# EAGLE board CANBUS_USB_Updated v3 (EAGLE 9.7.0)
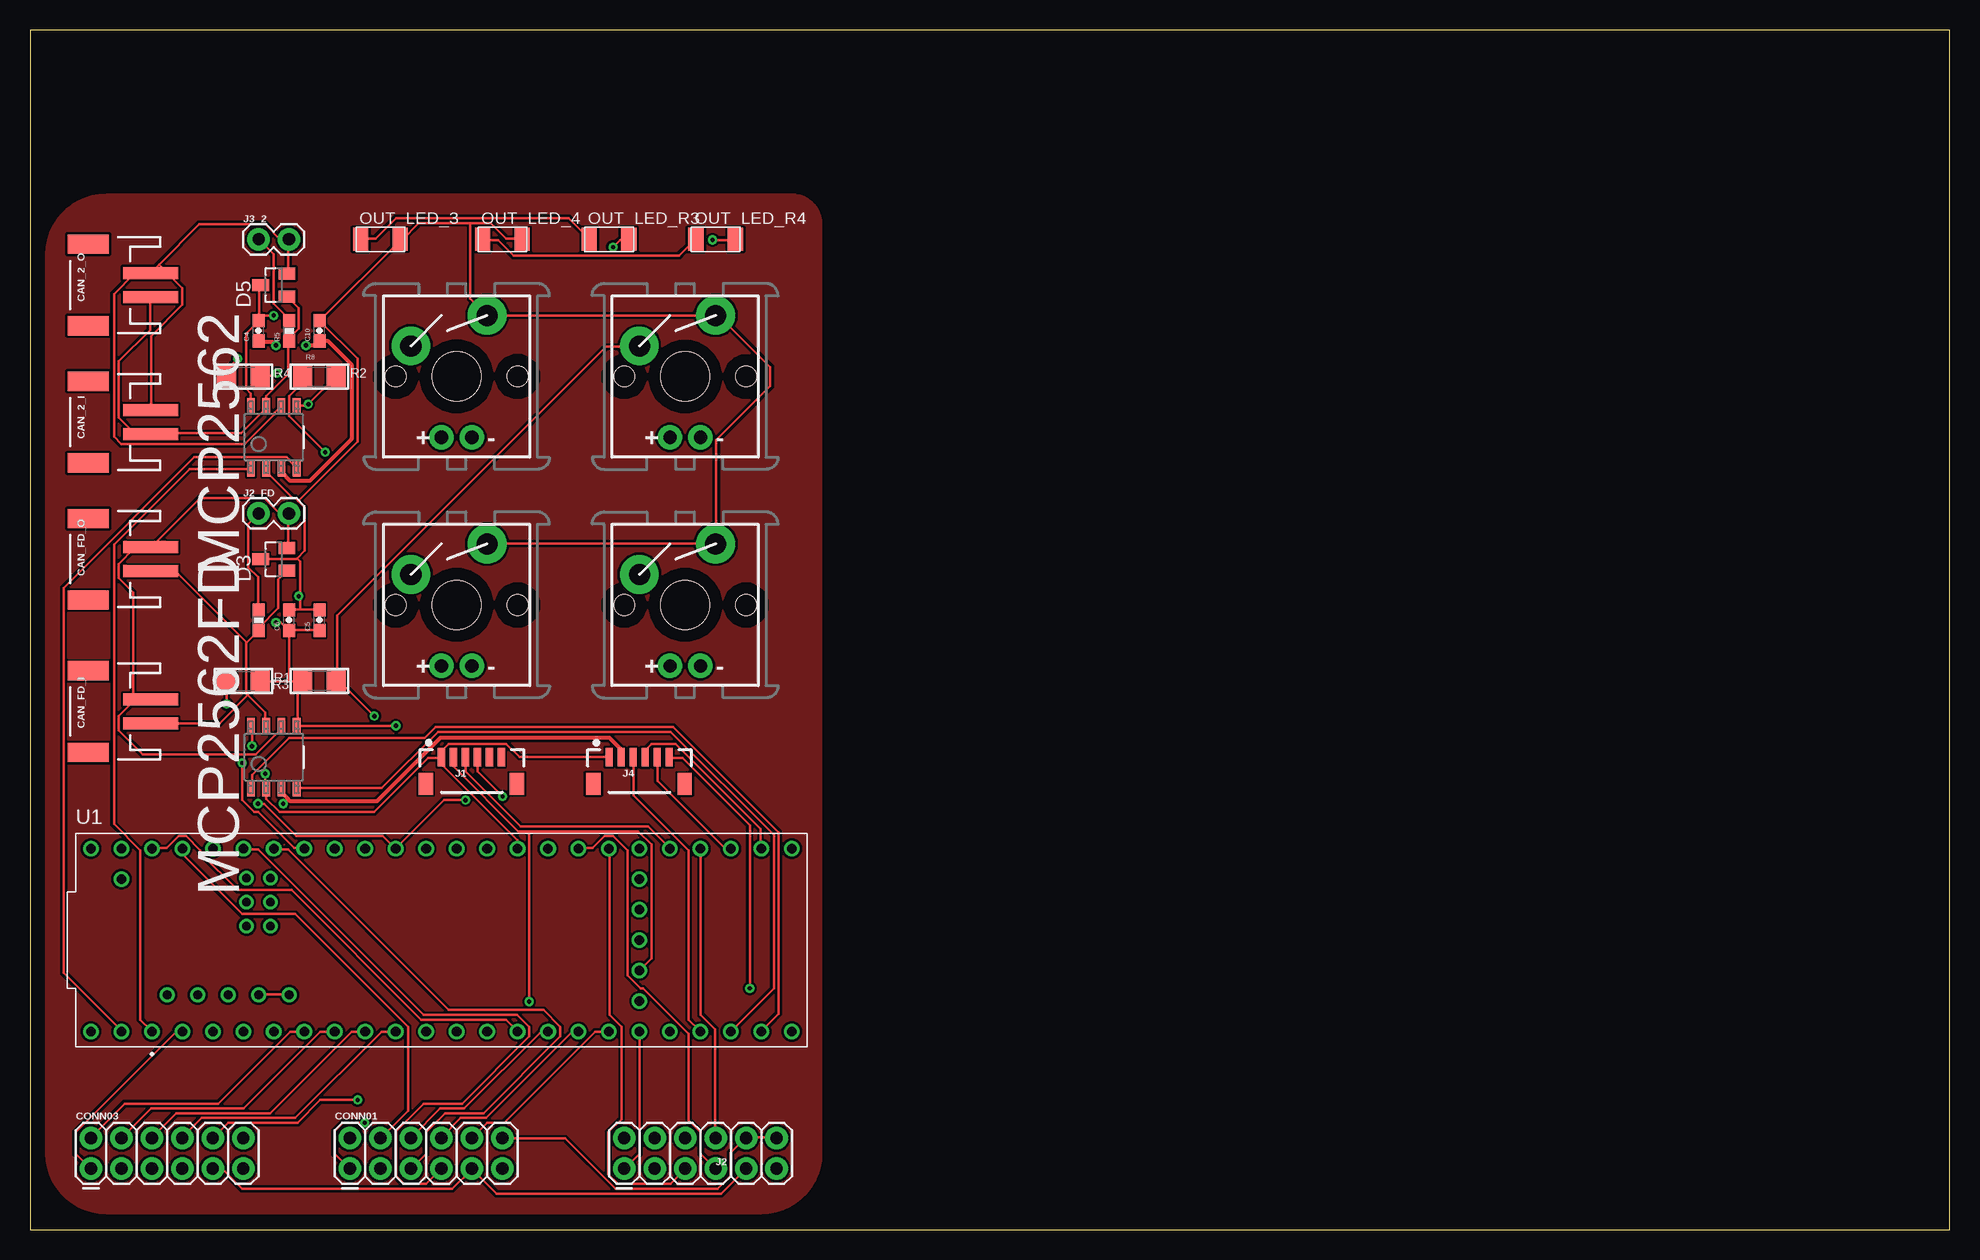
[diagram p0: board, top side]
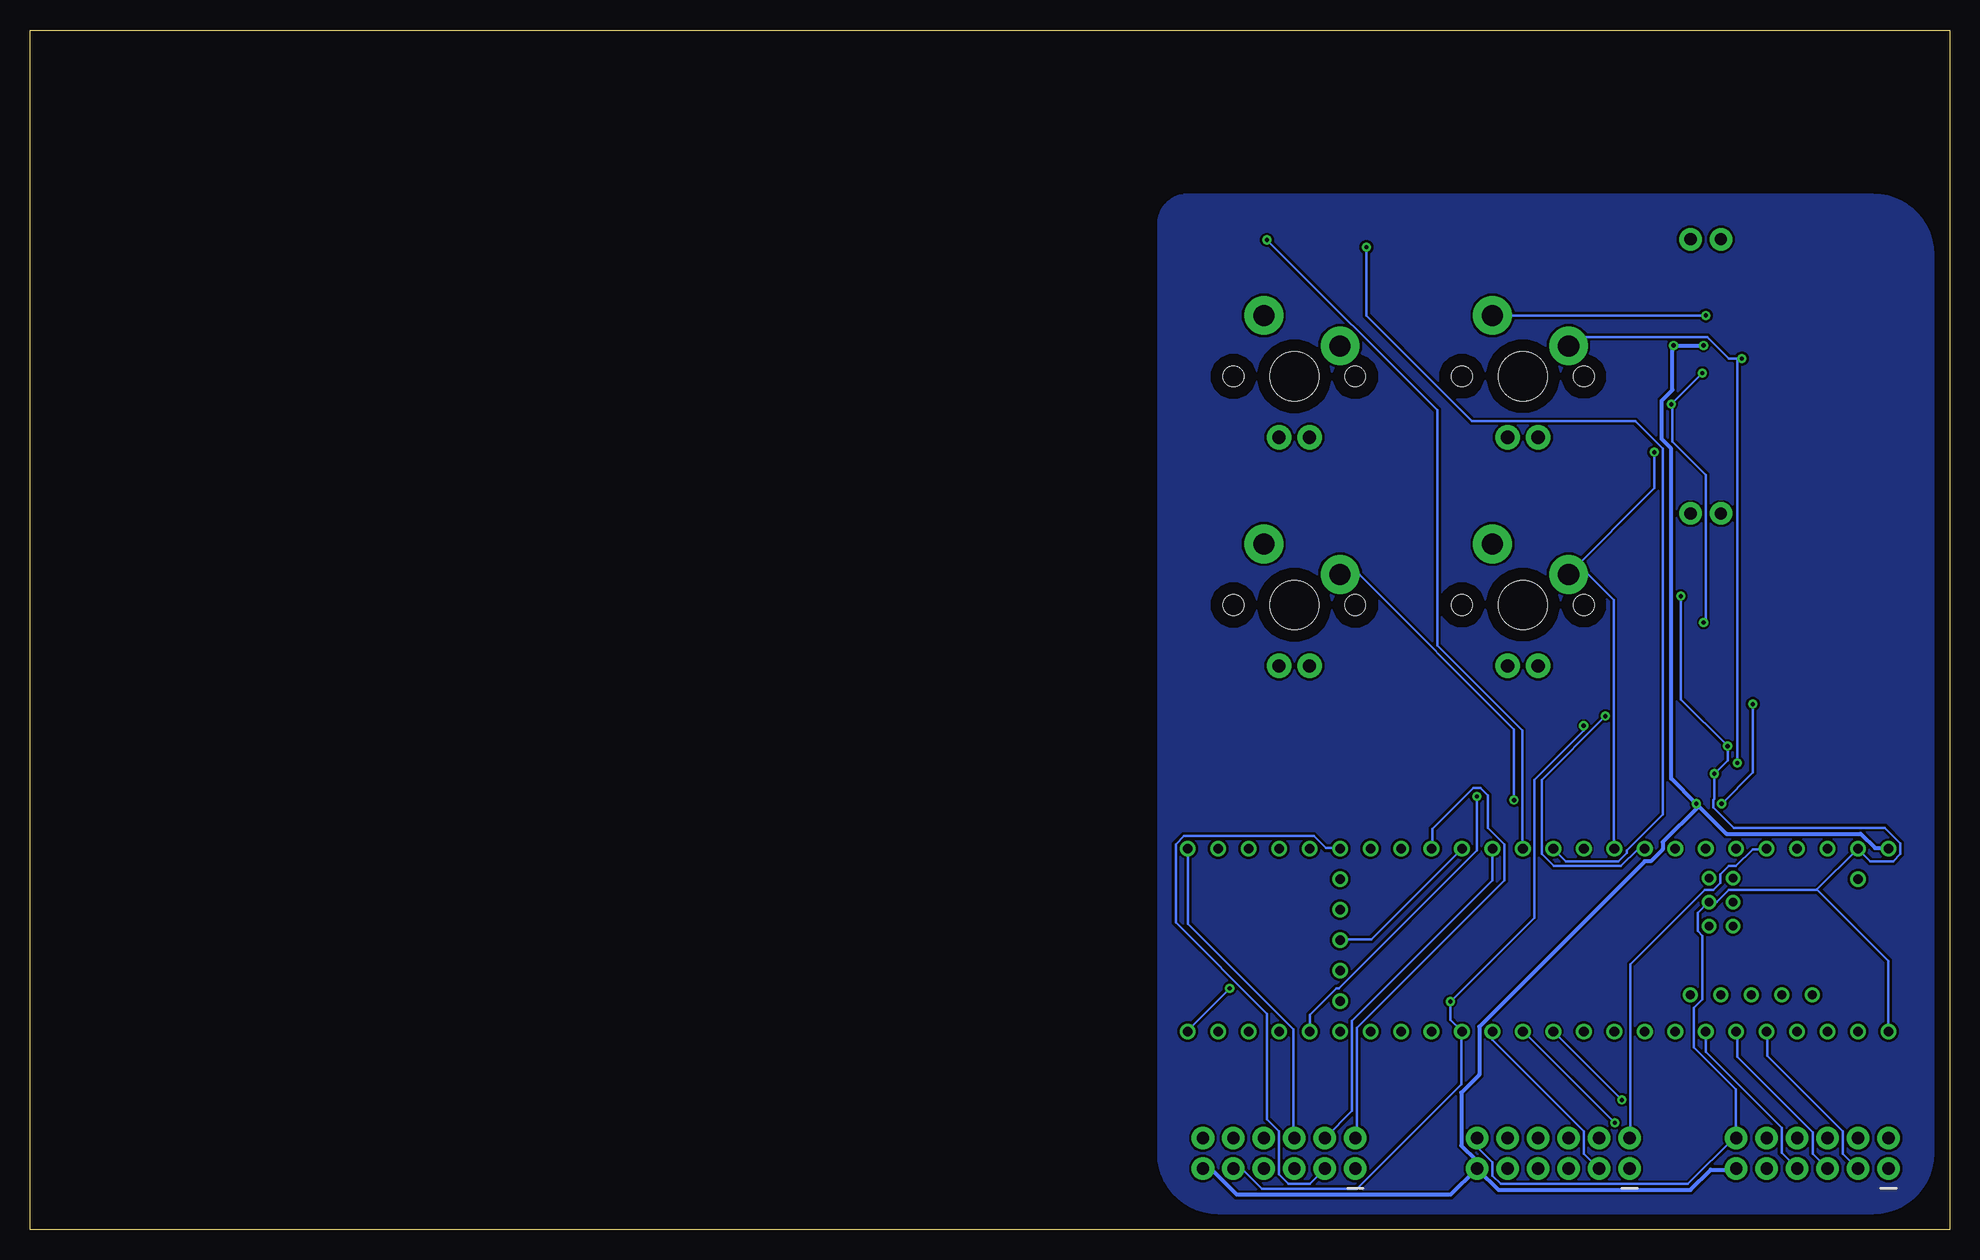
[diagram p1: board, bottom side, seen from below]

Size 160 x 100 mm. Coordinates in mm from the lower left corner, seen from the top.
Outline: 0,0 160,0 160,100 0,100 0,0
Copper layers (1*16): Top / Bottom
Stack-up Default Layer Stack: Top User Defined 0.035mm / Dielectric-1 User Defined 1.5mm / Bottom User Defined 0.035mm
Design rules "default *": minimum track width 6mil, minimum drill 0.35mm, track to track 6mil, track to pad 6mil, pad to pad 6mil, via to via 6mil, smd to smd 6mil, copper to edge 40mil, drill to drill 6mil, minimum pad ring 10mil, minimum via ring 8mil, stop-mask expansion 4mil, vias tented up to drill 0mil, thermal gap 10mil
Net classes: 0 default: width 0.2 mm, clearance 0.2 mm; 1 gnd: width 0.2 mm, clearance 0.2 mm; 3 vcc: width 0.35 mm, clearance 0.2 mm; 4 vcc5: width 0.35 mm, clearance 0.2 mm

## Footprints (pad centres in the part's own frame; a part is rotated, then mirrored left to right if it is on the bottom)
0603-CAP = smd 1.1 x 1: 1 -0.85,0; 2 0.85,0
JST-2-SMD = smd 1 x 4.6: 1 -1,-3.7; 2 1,-3.7 | smd 1.6 x 3.4: NC1 -3.4,1.5; NC2 3.4,1.5
2X6 = drill 1.016 pad 1.88: 1 0,0; 2 0,2.54; 3 2.54,0; 4 2.54,2.54; 5 5.08,0; 6 5.08,2.54; 7 7.62,0; 8 7.62,2.54; 9 10.16,0; 10 10.16,2.54; 11 12.7,0; 12 12.7,2.54
SOT23 = smd 1 x 1.4: 1 -0.95,-1.1; 2 0.95,-1.1; 3 0,1.1
1X06-1MM = smd 0.6 x 1.55: 1 -2.54,1.27; 2 -1.54,1.27; 3 -0.54,1.27; 4 0.46,1.27; 5 1.46,1.27; 6 2.46,1.27 | smd 1.2 x 1.8: P$1 -3.84,-0.955; P$2 3.76,-0.955
1X02 = drill 1.016 pad 1.88: 1 0,0; 2 2.54,0
MCP2562 = smd 1.27 x 0.635: CANH 2.625,0.635; CANL 2.625,-0.635; RXD -2.625,-1.905; STBY 2.625,1.905; TXD -2.625,1.905; VDD -2.625,-0.635; VIO 2.625,-1.905; VSS -2.625,0.635
LED1206FAB = smd 1.27 x 1.905: 1 -1.651,0; 2 1.651,0
R1206FAB = smd 1.27 x 1.905: 1 -1.651,0; 2 1.651,0
1206 = smd 1.6 x 1.8: 1 -1.4,0; 2 1.4,0
0603-RES = smd 1.1 x 1: 1 -0.85,0; 2 0.85,0
CHERRY-MX-LED = drill 1.092 pad 2.032: A -1.27,-5.08; K 1.27,-5.08 | drill 1.753 pad 3.226: S1 -3.81,2.54; S2 2.54,5.08 | hole 4.089: 0,0 | hole 1.707: -5.08,0; 5.08,0
MODULE_DEV-16771 = drill 0.8: 0 -26.67,-7.62; 1 -24.13,-7.62; 2 -21.59,-7.62; 3 -19.05,-7.62; 3.3V_1 6.35,-7.62; 3.3V_2 -24.13,7.62; 3.3V_3 16.51,-2.54; 4 -16.51,-7.62; 5 -13.97,-7.62; 6 -11.43,-7.62; 7 -8.89,-7.62; 8 -6.35,-7.62; 9 -3.81,-7.62; 10 -1.27,-7.62; 11 1.27,-7.62; 12 3.81,-7.62; 13 3.81,7.62; 14 1.27,7.62; 15 -1.27,7.62; 16 -3.81,7.62; 17 -6.35,7.62; 18 -8.89,7.62; 19 -11.43,7.62; 20 -13.97,7.62; 21 -16.51,7.62; 22 -19.05,7.62; 23 -21.59,7.62; 24 8.89,-7.62; 25 11.43,-7.62; 26 13.97,-7.62; 27 16.51,-7.62; 28 19.05,-7.62; 29 21.59,-7.62; 30 24.13,-7.62; 31 26.67,-7.62; 32 29.21,-7.62; 33 29.21,7.62; 34 26.67,7.62; 35 24.13,7.62; 36 21.59,7.62; 37 19.05,7.62; 38 16.51,7.62; 39 13.97,7.62; 40 11.43,7.62; 41 8.89,7.62; GND1 -29.21,-7.62; GND2 6.35,7.62; GND3 -26.67,7.62; GND4 16.51,0; ON/OFF 16.51,5.08; PROGRAM 16.51,2.54; VBAT 16.51,-5.08; VIN -29.21,7.62; VUSB -26.67,5.08 | drill 0.75: 5V -22.86,-4.57; D+ -17.78,-4.57; D- -20.32,-4.57; USB_GND1 -15.24,-4.57; USB_GND2 -12.7,-4.57 | drill 0.7: GND5 -14.24,3.17; LED -16.24,3.17; R+ -16.24,5.17; R- -14.24,5.17; T+ -14.24,1.17; T- -16.24,1.17

## Placement (x,y rotation side)
C4  0.1uf  [0603-CAP]  19.05,74.93 90 top
C5  0.1uf  [0603-CAP]  24.13,50.8 90 top
C6  0.1uf  [0603-CAP]  21.59,50.8 90 top
C10  0.1uf  [0603-CAP]  24.13,74.93 90 top
CAN_2_I  [JST-2-SMD]  6.35,67.31 90 top
CAN_2_O  [JST-2-SMD]  6.35,78.74 90 top
CAN_FD_I  [JST-2-SMD]  6.35,43.18 90 top
CAN_FD_O  [JST-2-SMD]  6.35,55.88 90 top
CONN01  2X6 FEMALE  [2X6]  26.67,5.08 0 top
CONN03  2X6 FEMALE  [2X6]  5.08,5.08 0 top
D3  PESD1CAN  [SOT23]  20.32,55.88 90 top
D5  PESD1CAN  [SOT23]  20.32,78.74 90 top
J1  [1X06-1MM]  36.83,38.1 0 top
J2  2X6 FEMALE  [2X6]  49.53,5.08 0 top
J2_FD  [1X02]  19.05,59.69 0 top
J3_2  [1X02]  19.05,82.55 0 top
J4  [1X06-1MM]  50.8,38.1 0 top
MCP2562  MCP2562  [MCP2562]  20.32,66.04 90 top
MCP2562FD  MCP2562  [MCP2562]  20.32,39.37 90 top
OUT_LED_3  LEDFAB1206  [LED1206FAB]  29.21,82.55 0 top
OUT_LED_4  LEDFAB1206  [LED1206FAB]  39.37,82.55 0 top
OUT_LED_R3  500  [R1206FAB]  48.26,82.55 0 top
OUT_LED_R4  500  [R1206FAB]  57.15,82.55 0 top
R1  [1206]  17.78,45.72 0 top
R2  [1206]  24.13,71.12 0 top
R3  [1206]  24.13,45.72 180 top
R4  [1206]  17.78,71.12 0 top
R5  120Ohms  [0603-RES]  21.59,74.93 90 top
R8  120Ohms FD  [0603-RES]  19.05,50.8 90 top
S1  CHERRY-MX-LED  [CHERRY-MX-LED]  54.61,52.07 0 top
S2  CHERRY-MX-LED  [CHERRY-MX-LED]  35.56,52.07 0 top
S3  CHERRY-MX-LED  [CHERRY-MX-LED]  54.61,71.12 0 top
S4  CHERRY-MX-LED  [CHERRY-MX-LED]  35.56,71.12 0 top
U1  DEV-16771  [MODULE_DEV-16771]  34.29,24.13 0 top

## Library data of the parts
C4-C6 C10 = SparkFun-Capacitors; PROD_ID: CAP-00810
CAN_2_I CAN_2_O CAN_FD_I CAN_FD_O = SparkFun-Connectors; PROD_ID: CONN-11443
CONN01 CONN03 J2 = SparkFun-Connectors; PROD_ID: CONN-12423
D3 D5 = diode
J1 J4 = SparkFun-Connectors; PROD_ID: CONN-08249; SF_ID: GPS-00579
J2_FD J3_2 = SparkFun-Connectors
MCP2562 MCP2562FD = MCP2562
OUT_LED_3 OUT_LED_4 OUT_LED_R3 OUT_LED_R4 = fab
R1-R4 = microbuilder
R5 R8 = SparkFun-Resistors; PROD_ID: RES-00824
S1-S4 = cherry-temp
U1 = DEV-16771; AVAILABILITY: In Stock; DESCRIPTION: RT1062 Teensy 4.1 series ARM® Cortex®-M7 MPU Embedded Evaluation Board; MF: SparkFun Electronics; MP: DEV-16771; PACKAGE: None; PRICE: None; PURCHASE-URL: https://pricing.snapeda.com/search?q=DEV-16771&ref=eda

## Nets
3.3V: C5.1 C6.1 CONN01.9 CONN03.9 J1.2 J2.9 MCP2562.VIO MCP2562FD.VIO R1.2 R2.2 R3.2 R4.2 U1.3.3V_1 U1.3.3V_2 U1.3.3V_3
5V: U1.5V
CAN_H: CAN_FD_I.1 CAN_FD_O.1 D3.1 MCP2562FD.CANH R8.1
CAN_H1: CAN_2_I.1 CAN_2_O.1 D5.1 MCP2562.CANH R5.1
CAN_L: CAN_FD_I.2 CAN_FD_O.2 D3.2 J2_FD.2 MCP2562FD.CANL
CAN_L1: CAN_2_I.2 CAN_2_O.2 D5.2 J3_2.2 MCP2562.CANL
CAN_RX2: MCP2562.RXD U1.0
CAN_RX3: MCP2562FD.RXD U1.30
CAN_TX2: MCP2562.TXD U1.1
CAN_TX3: MCP2562FD.TXD U1.31
GND_MCU: C4.2 C5.2 C6.2 C10.2 CONN01.12 CONN03.12 D3.3 D5.3 J1.1 J2.10 J2.12 J4.1 MCP2562.STBY MCP2562.VSS MCP2562FD.STBY MCP2562FD.VSS OUT_LED_3.2 OUT_LED_4.2 S1.S2 S2.S2 S3.S2 S4.S2 U1.GND1 U1.GND2 U1.GND3 U1.GND4 U1.GND5
GPIO_01: CONN03.1 U1.2
GPIO_02: CONN03.3 U1.3
GPIO_03: CONN03.5 U1.4
GPIO_04: CONN03.7 U1.5
GPIO_05: CONN03.2 U1.6
GPIO_06: CONN03.4 U1.7
GPIO_07: CONN03.6 U1.8
GPIO_08: CONN03.8 U1.9
GPIO_09: CONN03.10 U1.10
GPIO_10: CONN01.1 U1.11
GPIO_11: CONN01.3 U1.12
GPIO_12: CONN01.5 U1.20
GPIO_13: CONN01.7 U1.21
GPIO_14: CONN01.2 U1.22
GPIO_15: CONN01.4 U1.23
GPIO_16: CONN01.6 U1.24
GPIO_17: CONN01.8 U1.25
GPIO_18: CONN01.10 U1.26
GPIO_19: J2.1 U1.27
GPIO_20: J2.3 U1.38
GPIO_21: J2.5 U1.39
GPIO_22: J2.7 U1.40
GPIO_23: J2.2 U1.41
GPIO_24: J2.4 U1.13
GPIO_25: J2.6 U1.33
GPIO_26: J2.8 U1.36
GPIO_27: J1.3 U1.37
GPIO_28: J1.4 U1.28
GPIO_29: J4.3 U1.29
GPIO_30: J4.4 U1.34
GPIO_31: J4.5 U1.35
GPIO_32: J4.6 U1.32
KEY_01: R1.1 S1.S1 U1.16
KEY_02: R2.1 S2.S1 U1.17
KEY_03: R3.1 S3.S1 U1.18
KEY_04: R4.1 S4.S1 U1.19
LED_15: OUT_LED_R4.2 U1.14
LED_16: OUT_LED_R3.2 U1.15
N$2: J2_FD.1 R8.2
N$5: J3_2.1 R5.2
N$6: OUT_LED_3.1 OUT_LED_R3.1
N$7: OUT_LED_4.1 OUT_LED_R4.1
SWITCH_01: J1.6
SWITCH_02: J1.5
USB_GND: U1.USB_GND1 U1.USB_GND2
VCC_5V [vcc5]: C4.1 C10.1 CONN01.11 CONN03.11 J2.11 J4.2 MCP2562.VDD MCP2562FD.VDD U1.VIN

## Tracks (layer width: path | path; a pad name or v marks a point on that pad's centre or on a via)
3.3V  (via drill 0.35)
  Top 0.2: CONN03.9 15.3,5 16.1,5 17.7,3.4 35.2,3.4 36.8,5 CONN01.9 36.9,5 38.9,3 57.6,3 59.6,5 J2.9 | MCP2562.VIO 22.3,68.7 23.1,68.7 v23.2,68.8 25.5,71.1 R2.2 | v20.6,71.4 20.4,71.2 19.2,71.2 R4.2 | C6.1 21.6,50 24.1,50 C5.1 | 21.6,45.7 22,45.7 22.3,45.4 R3.2 22.7,45.7 22.3,45.3 22.3,42 MCP2562FD.VIO 22.4,42 v30.5,42 | 21.6,45.7 19.2,45.7 R1.2 | 21.6,45.7 21.6,49.9 C6.1 | v20.5,50.6 20.9,50.6 21.5,50 C6.1 | 41.6,33.2 50.7,33.2 51.8,32.1 51.8,22.6 U1.3.3V_3 | 41.6,33.2 40.7,33.2 35.3,38.6 35.3,39.3 J1.2 | U1.3.3V_2 10.2,31.8 11.4,31.8 12.4,32.8 13,32.8 14.2,31.6 14.2,31.4 17.3,28.3 21.8,28.3 32.6,17.5 39.7,17.5 40.6,16.6 U1.3.3V_1 | v41.6,19 41.6,33.2
  Bottom 0.2: v20.6,71.4 v23.2,68.8 23.1,68.8 23.1,65.7 20.3,62.9 20.3,50.8 v20.5,50.6 | v30.5,42 30.5,41.6 34.6,37.5 34.6,26 v41.6,19 41.6,17.5 40.7,16.6 U1.3.3V_1 40.7,16.5 40.7,12.1 49.4,3.4 57.3,3.4 58.9,5 59.6,5 J2.9
CAN_H
  Top 0.2: D3.1 21.4,54.9 20.7,54.2 20.7,51.8 19.1,50.2 19.1,50 R8.1 18.05,48.95 | 18.15,44.55 18,44.7 18,48.9 18.05,48.95 | 18.15,44.55 19.6,43.1 19.6,42 MCP2562FD.CANH | 18.15,44.55 15.8,42.2 10.1,42.2 CAN_FD_I.1 | 18.05,48.95 12.2,54.8 10.1,54.8 CAN_FD_O.1
CAN_H1
  Top 0.2: D5.1 21.5,77.7 22.4,76.8 22.4,75.1 21.6,74.3 21.6,74.1 R5.1 21.5,74 21.5,71.3 19.7,69.5 19.7,68.7 MCP2562.CANH 19.6,68.6 19.6,68.4 17.6,66.4 10.1,66.4 CAN_2_I.1 10,66.4 8.7,66.4 7.4,67.7 7.4,72.4 10,75 10,77.7 CAN_2_O.1
CAN_L
  Top 0.2: MCP2562FD.CANL 20.9,41.9 20.9,41.7 18.8,39.6 9.4,39.6 7.4,41.6 7.4,42.8 8.7,44.1 10,44.1 CAN_FD_I.2 8.6,44.1 8.6,53.1 7.4,54.3 7.4,55.5 8.7,56.8 10,56.8 CAN_FD_O.2 10.1,56.9 14.2,61 19.5,61 20.8,59.7 21.5,59.7 J2_FD.2 21.5,59.6 21.5,56.9 D3.2
CAN_L1
  Top 0.2: D5.2 21.5,79.7 21.5,82.5 J3_2.2 21.4,82.5 20.9,82.5 19.6,83.8 14.1,83.8 10.75,80.45 | MCP2562.CANL 20.9,68.6 20.4,68.1 20.4,68 17.9,65.5 7.6,65.5 7,66.1 7,78 8.7,79.7 10,79.7 CAN_2_O.2 10.1,79.8 10.75,80.45 | 10.75,80.45 12.7,78.5 12.7,77.1 10.1,74.5 10.1,68.4 CAN_2_I.2
CAN_RX2
  Top 0.2: MCP2562.RXD 22.2,63.5 21.6,64.1 21.6,64.2 21.4,64.4 13.7,64.4 2.8,53.5 2.8,21.4 7.6,16.6 U1.0
CAN_RX3
  Top 0.2: MCP2562FD.RXD 22.3,36.8 29.3,36.8 34,41.5 53.4,41.5 62,32.9 62,20.1 58.5,16.6 U1.30
CAN_TX2
  Top 0.2: MCP2562.TXD 18.4,63.4 13.3,63.4 7,57.1 7,33.8 9.2,31.6 9.2,17.5 10.1,16.6 U1.1
CAN_TX3
  Top 0.2: MCP2562FD.TXD 18.5,36.8 18.5,37.9 21.6,41 32.9,41 33.8,41.9 53.6,41.9 62.4,33.1 62.4,18 61,16.6 U1.31
GND_MCU  (via drill 0.35)
  Top 0.2: 22.5,51.7 24.1,51.7 C5.2 | 22.5,51.7 21.6,51.7 C6.2 | 22.35,60.75 22.9,60.2 22.9,56.6 22.25,55.95 | 22.35,60.75 22.1,61 21.9,61 19.7,63.2 19.7,63.4 MCP2562.VSS | 22.25,55.95 22.2,55.9 19.3,55.9 D3.3 | 22.5,52.8 22.5,55.7 22.25,55.95 | 22.5,52.8 22.5,51.7 | 36.7,83.9 32.4,83.9 31,82.5 OUT_LED_3.2 30.9,82.5 24.2,75.8 C10.2 24.2,75.7 27.3,72.6 27.3,65.7 22.35,60.75 | 36.7,83.9 38.4,83.9 39.7,82.6 41,82.6 OUT_LED_4.2 | S2.S2 38.1,57.2 57.1,57.2 S1.S2 57.2,57.2 57.2,65.8 61.7,70.3 61.7,71.9 57.4,76.2 S3.S2 S4.S2 36.7,77.6 36.7,83.9 | 19.1,76.2 19.1,78.6 19.2,78.7 D5.3 | 19.1,76.2 19.1,75.8 C4.2 | MCP2562.STBY 18.4,68.7 18.4,69.7 18,70.1 18,74.7 19,75.7 C4.2 | v20.3,76.2 19.1,76.2 | 19.1,76.2 C4.2 | J1.1 34.2,39.3 33.2,39.3 28.7,34.8 20.8,34.8 19.7,35.9 19.7,36.7 MCP2562FD.VSS 19.6,36.8 v19.6,38 | v18.5,40.3 18.5,41.9 MCP2562FD.STBY | J4.1 48.2,39.4 40.8,39.4 39.7,40.5 34.9,40.5 34.3,39.9 34.3,39.4 J1.1 | U1.GND2 40.6,31.8 40.6,32.5 34.2,38.9 34.2,39.2 J1.1 | CONN01.12 39.4,7.6 44.6,7.6 48.8,3.4 57.3,3.4 58.4,4.5 58.4,6.4 59.6,7.6 J2.10 59.7,7.7 62.2,7.7 J2.12 | v22.4,52.8 22.5,52.8
  Bottom 0.2: S4.S2 v20.3,76.2 | U1.GND4 50.8,24.2 48.2,24.2 40.7,31.7 U1.GND2 | 11.05,28.35 7.7,31.7 U1.GND3 7.6,31.7 6.6,30.7 4.7,30.7 4.1,31.3 4.1,32.2 5.4,33.5 18,33.5 19.7,35.2 19.7,35.8 19.6,35.9 v19.6,38 18.5,39.1 v18.5,40.3 22.4,44.2 v22.4,52.8 | 11.05,28.35 11.1,28.3 18.4,28.3 19.4,27.3 U1.GND5 20.1,27.3 21,26.4 21,24.9 20.6,24.5 20.6,19.2 21.3,18.5 21.3,15.2 17.8,11.7 17.8,7.7 CONN03.12 17.9,7.7 21.8,3.8 37.4,3.8 38.1,4.5 38.1,5.6 39.3,6.8 39.3,7.6 CONN01.12 | 11.05,28.35 5.1,22.4 5.1,16.6 U1.GND1
GPIO_01
  Top 0.2: U1.2 12.2,16.5 3.8,8.1 3.8,6.3 5,5.1 CONN03.1
GPIO_02
  Bottom 0.2: U1.3 15.2,16.5 15.2,14.5 8.9,8.2 8.9,6.3 7.7,5.1 CONN03.3
GPIO_03
  Bottom 0.2: U1.4 17.7,16.5 17.7,14.4 11.4,8.1 11.4,6.3 10.2,5.1 CONN03.5
GPIO_04
  Bottom 0.2: U1.5 20.3,16.5 20.3,14.8 14,8.5 14,6.4 12.7,5.1 CONN03.7
GPIO_05
  Top 0.2: U1.6 22.8,16.5 21.7,16.5 15.7,10.5 7.9,10.5 5.1,7.7 CONN03.2
GPIO_06
  Top 0.2: CONN03.4 10.1,10.1 17.8,10.1 24.2,16.5 U1.7
GPIO_07
  Top 0.2: U1.8 27.9,16.5 26.8,16.5 20,9.7 12.2,9.7 10.2,7.7 CONN03.6
GPIO_08
  Top 0.2: U1.9 30.4,16.5 29.3,16.5 22.1,9.3 14.3,9.3 12.7,7.7 CONN03.8
GPIO_09  (via drill 0.35)
  Top 0.2: v27.3,10.8 24.2,10.8 22.3,8.9 16.5,8.9 15.3,7.7 CONN03.10
  Bottom 0.2: v27.3,10.8 33,16.5 U1.10
GPIO_10  (via drill 0.35)
  Top 0.2: v27.9,8.9 26.1,8.9 25.4,8.2 25.4,6.3 26.6,5.1 CONN01.1
  Bottom 0.2: v27.9,8.9 35.5,16.5 U1.11
GPIO_11
  Bottom 0.2: U1.12 38.1,15.8 30.5,8.2 30.5,6.3 29.3,5.1 CONN01.3
GPIO_12
  Top 0.2: U1.20 20.4,31.7 21.5,31.7 34.9,18.3 42.8,18.3 44.2,16.9 44.2,16.1 37.8,9.7 34.6,9.7 33,8.1 33,6.3 31.8,5.1 CONN01.5
GPIO_13
  Top 0.2: U1.21 17.8,31.7 19,31.7 32.8,17.9 40.6,17.9 41.6,16.9 41.6,16.1 36,10.5 32.8,10.5 30.5,8.2 30.5,4.5 31.2,3.8 33,3.8 34.2,5 CONN01.7
GPIO_14
  Bottom 0.2: U1.22 15.3,31.7 16.4,31.7 17.8,30.3 18.4,30.3 19.1,29.6 19.1,28.9 19.7,28.3 20.4,28.3 26.6,22.1 26.6,7.7 CONN01.2
GPIO_15
  Top 0.2: U1.23 12.7,31.3 17.7,26.3 22.1,26.3 31.5,16.9 31.5,9.9 29.3,7.7 CONN01.4
GPIO_16
  Top 0.2: U1.24 43.1,16.5 42.6,16.5 36.2,10.1 34.2,10.1 31.8,7.7 CONN01.6
GPIO_17
  Top 0.2: U1.25 45.7,16.5 45.2,16.5 38,9.3 35.9,9.3 34.3,7.7 CONN01.8
GPIO_18
  Top 0.2: U1.26 48.2,16.5 47.1,16.5 39.5,8.9 38.1,8.9 36.9,7.7 CONN01.10
GPIO_19
  Top 0.2: U1.27 50.8,6.3 49.6,5.1 J2.1
GPIO_20
  Bottom 0.2: U1.38 50.8,31.8 52,31.8 53,32.8 63.8,32.8 64.5,32.1 64.5,25.6 56.9,18 56.9,9.2 55.9,8.2 55.9,4.6 55.1,3.8 53.3,3.8 52.1,5 J2.3
GPIO_21
  Top 0.2: U1.39 48.3,31.7 48.3,17.9 49.3,16.9 49.3,9.2 48.2,8.1 48.2,4.6 49,3.8 53.4,3.8 54.6,5 J2.5
GPIO_22
  Top 0.2: U1.40 45.8,31.8 46.9,31.8 47.9,32.8 48.6,32.8 49.8,31.6 49.8,21.2 50.9,20.1 51.1,20.1 54.9,16.3 54.9,9.1 55.9,8.1 55.9,6.3 57.1,5.1 J2.7
GPIO_23
  Bottom 0.2: U1.41 43.1,31.8 43.1,33.4 39.7,36.8 39.1,36.8 38.5,36.2 38.5,33.5 37.1,32.1 37.1,29.1 49.4,16.8 49.4,7.8 49.5,7.7 J2.2
GPIO_24
  Bottom 0.2: U1.13 38.1,29.1 49.8,17.4 49.8,9.9 52,7.7 J2.4
GPIO_25
  Bottom 0.2: U1.33 63.5,25.5 54.7,16.7 54.7,7.7 J2.6
GPIO_26
  Top 0.2: U1.36 55.9,31.7 55.9,17.9 57.1,16.7 57.1,7.7 J2.8
GPIO_27
  Top 0.2: J1.3 36.3,39.3 36.3,38.2 40.9,33.6 51.5,33.6 53.3,31.8 U1.37
GPIO_28  (via drill 0.35)
  Top 0.2: v39.4,36.1 37.3,38.2 37.3,39.3 J1.4
  Bottom 0.2: v39.4,36.1 39.4,31.6 50.9,20.1 51.1,20.1 53.3,17.9 53.3,16.6 U1.28
GPIO_29
  Top 0.2: J4.3 50.3,39.3 50.3,36.2 54.9,31.6 54.9,17.5 55.8,16.6 U1.29
GPIO_30
  Top 0.2: J4.4 51.3,39.4 51.3,40 51.8,40.5 53.8,40.5 60.9,33.4 60.9,31.8 U1.34
GPIO_31
  Top 0.2: J4.5 52.3,39.3 52.3,37.4 57.9,31.8 58.4,31.8 U1.35
GPIO_32  (via drill 0.35)
  Top 0.2: v60,20.1 60,33.7 54.4,39.3 53.3,39.3 J4.6
  Bottom 0.2: v60,20.1 63.5,16.6 U1.32
KEY_01  (via drill 0.35)
  Top 0.2: v16.4,43.8 16.4,45.7 R1.1 | v19,35.5 19.5,35.5 22.2,32.8 29.4,32.8 30.4,31.8 U1.16 30.5,31.8 34.5,35.8 v36.3,35.8
  Bottom 0.2: v16.4,43.8 16.4,38.1 v19,35.5 | v36.3,35.8 36.3,41.7 49.2,54.6 S1.S1
KEY_02  (via drill 0.35)
  Top 0.2: v24.6,64.8 21.6,67.8 21.6,69.5 22.7,70.6 22.7,71.1 R2.1
  Bottom 0.2: v24.6,64.8 24.6,61.8 31.7,54.7 S2.S1 30.9,55.4 28,52.5 28,31.8 U1.17
KEY_03  (via drill 0.35)
  Top 0.2: S3.S1 50.8,73.6 48,73.6 25.6,51.2 25.6,45.8 R3.1 25.7,45.8 v28.7,42.8
  Bottom 0.2: v28.7,42.8 34,37.5 34,31.3 33,30.3 27.4,30.3 26,31.7 25.4,31.7 U1.18
KEY_04  (via drill 0.35)
  Top 0.2: v17.3,72.6 16.4,71.7 16.4,71.2 R4.1 | v17.7,38.9 17.7,35.8 18.7,34.8 19,34.8 22,31.8 22.8,31.8 U1.19
  Bottom 0.2: 17.7,72.6 18.4,72.6 20.2,74.4 31,74.4 31.7,73.7 S4.S1 | 17.7,72.6 v17.3,72.6 | 17.7,72.6 v17.7,38.9
LED_15  (via drill 0.35)
  Top 0.2: v56.9,82.5 58.8,82.5 OUT_LED_R4.2
  Bottom 0.2: v56.9,82.5 42.7,68.3 42.7,48.7 35.6,41.6 35.6,31.8 U1.14
LED_16  (via drill 0.35)
  Top 0.2: v48.6,81.9 49.2,82.5 49.9,82.5 OUT_LED_R3.2
  Bottom 0.2: v48.6,81.9 48.6,76.2 39.8,67.4 26.2,67.4 23.9,65.1 23.9,34.6 26.9,31.6 26.9,31.4 27.6,30.7 32,30.7 33,31.7 U1.15
N$1
  pour Top: 6.35,86.36 63.5,86.36 arc-90 66.04,83.82 66.04,6.35 arc-90 60.96,1.27 6.35,1.27 arc-90 1.27,6.35 1.27,81.28 arc-90
N$2
  Top 0.2: R8.2 19,51.7 19,54.4 18.2,55.2 18.2,58.8 19,59.6 J2_FD.1
N$3
  pour Bottom: 6.35,86.36 63.5,86.36 arc-90 66.04,83.82 66.04,6.35 arc-90 60.96,1.27 6.35,1.27 arc-90 1.27,6.35 1.27,81.28 arc-90
N$5
  Top 0.2: J3_2.1 20.3,81.3 20.3,77.2 21.5,76 21.5,75.8 R5.2
N$6
  Top 0.2: OUT_LED_3.1 27.6,82.6 28.8,82.6 30.5,84.3 44.9,84.3 46.6,82.6 OUT_LED_R3.1
N$7
  Top 0.2: OUT_LED_4.1 37.8,82.5 39,82.5 40.3,81.2 54.1,81.2 55.4,82.5 OUT_LED_R4.1
USB_GND
  Top 0.2: U1.USB_GND1 19.1,19.6 21.5,19.6 U1.USB_GND2
VCC_5V  (via drill 0.35)
  Top 0.35: v20.5,73.7 20.2,74 19.1,74 C4.1 | v23,73.7 23.8,73.7 24.1,74 C10.1 24.3,74.1 24.8,74.1 26.8,72.1 26.8,65.9 23.3,62.4 21.7,62.4 21,63.1 21,63.4 MCP2562.VDD | 21.5,35.9 21.7,35.7 28.9,35.7 34.2,41 48.3,41 49.2,40.1 49.2,39.4 J4.2 | 21.5,35.9 21,36.4 21,36.7 MCP2562FD.VDD | 21.5,35.9 v21.1,35.5
  Bottom 0.35: CONN03.11 17.8,5 19.9,5 21.6,3.3 37.6,3.3 39.3,5 CONN01.11 | J2.11 62.2,5 61.5,5 59.4,2.9 41.6,2.9 39.5,5 CONN01.11 | v20.5,73.7 v23,73.7 23.1,73.6 23.1,70 24,69.1 24,65.9 23.2,65.1 23.2,37.6 v21.1,35.5 | v21.1,35.5 18.6,33 7.4,33 6.2,31.8 5.1,31.8 U1.VIN | CONN01.11 39.5,5.2 39.5,5.8 40.7,7 40.7,11.4 39.2,12.9 39.2,16.9 25.4,30.7 24.9,30.7 23.9,31.7 23.9,32.3 21,35.2 v21.1,35.5